# Altium PCB PCB_555振荡器_2_2022-10-18.pcbdoc
Units mil, origin at the board's own origin, x right, y up, seen from the top; angles counter-clockwise.
Board outline 2742.28 x 2151.73 mil, 2 copper layers (Top Layer, Bottom Layer); 7 components, 6 nets, 26 pads, 0 vias.
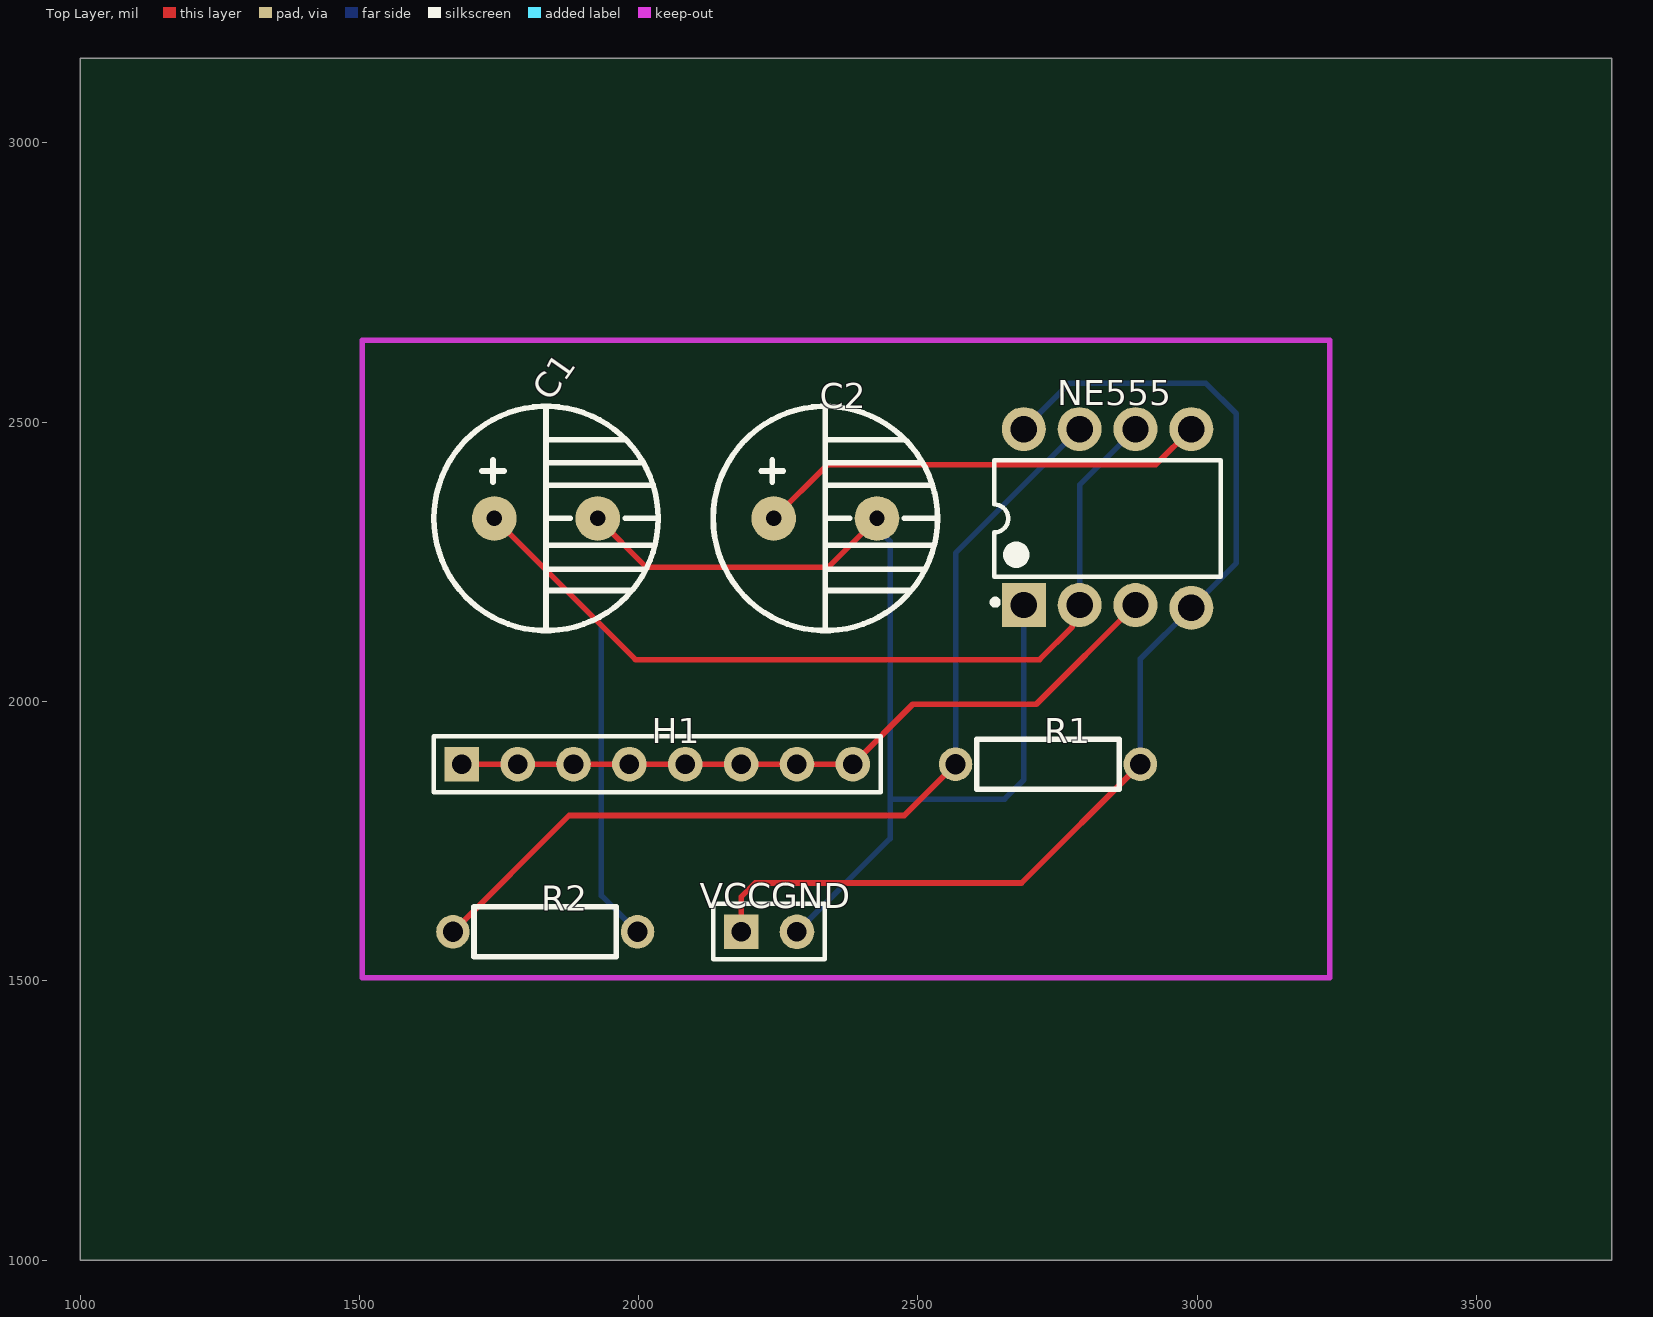
[diagram p0: Top Layer view]
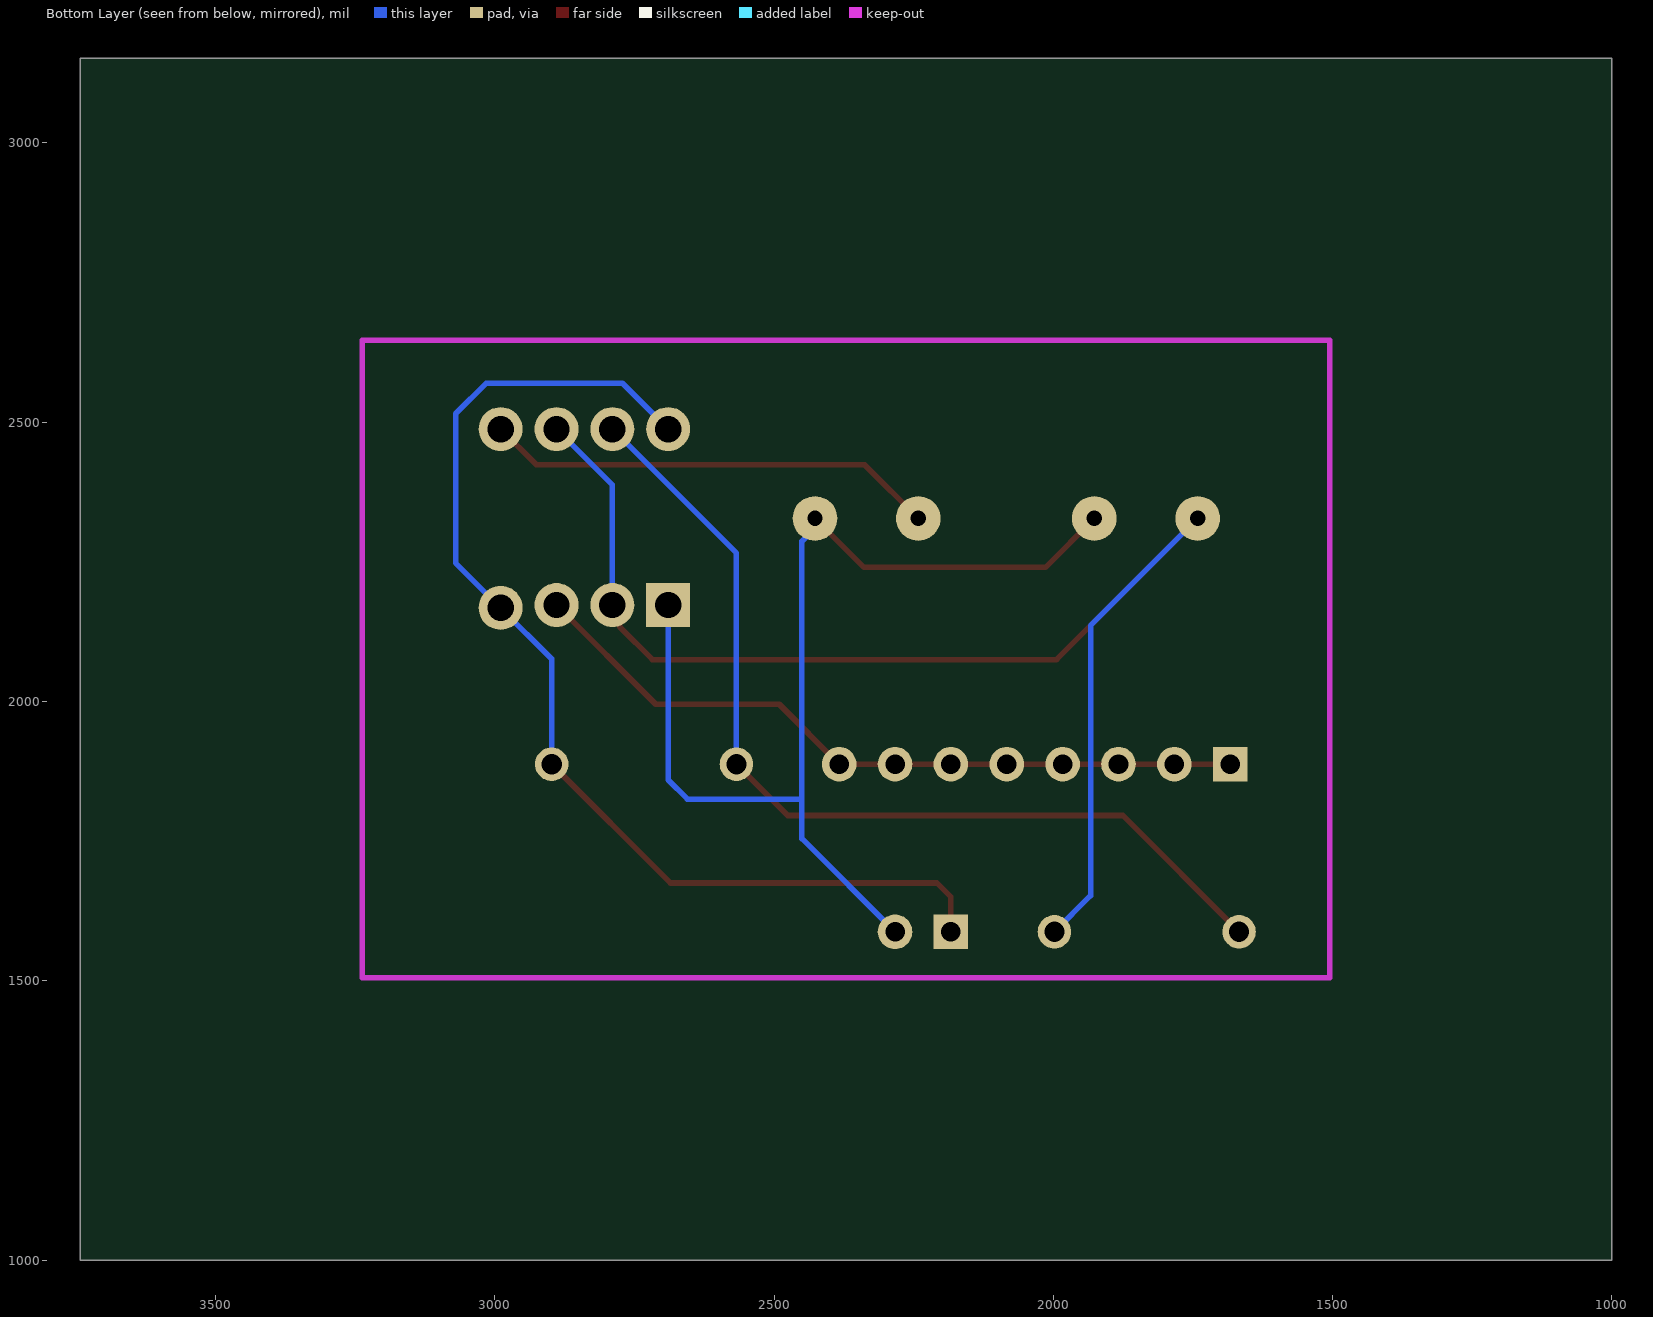
[diagram p1: Bottom Layer view, seen from below]

## Layer stack, top to bottom
Top Solder: solder mask 0.4, Solder Resist, Dk 3.5
Top Layer: signal copper 1.4
Dielectric1: dielectric 12.6, FR-4, Dk 4.8
Bottom Layer: signal copper 1.4
Bottom Solder: solder mask 0.4, Solder Resist, Dk 3.5

## Board outline
3742.28,1000 1000,1000 1000,3151.73 3742.28,3151.73

## Design rules (kind name [scope] priority, off if disabled: settings)
Clearance [All] p1: gap=10 ignorepadtopadclearanceinfootprint=FALSE except(0: Arc-Hole Track-Hole SMDPad-Hole THPad-Hole Via-Hole Fill-Hole Poly-Hole Region-Hole Text-Hole)
PolygonConnect [All] p1: connectstyle=Relief reliefconductorwidth=10 reliefentries=4 polygonreliefangle="90 Angle" airgapwidth=10
RoutingVias [All] p1: holewidth=28 width=50 viastyle="Through Hole" minholewidth=28 minwidth=50 maxholewidth=28 maxwidth=50
SolderMaskExpansion [All] p1: expansion=4 istentingtop=FALSE
Width [All] p1: maxlimit=10 minlimit=10 preferedwidth=10
30 further rules are at their usual default settings.

## Components (designator, comment, footprint, x,y, rotation, side; value= is the part's Value field where it differs from the comment)
C1 "直插电容470UF" ?#1 1834.1,2327.64 r0 top
C2 "直插电容10nF" ?#1 2334.1,2327.64 r0 top
H1 "HDR-F-2.54_1x8" HDR-F-2.54_1X8 1983.31,1887.64 r0 top
NE555 "NE555P" ?#2 2839.41,2327.64 r0 top
R1 "1k" ?#3 2732.66,1887.64 r0 top
R2 "1k" ?#3 1832.66,1587.64 r0 top
VCCGND "HDR-F-2.54_1x2" HDR-F-2.54_1X2 2233.31,1587.64 r0 top

## Footprints (in the part's own frame and the unit in brackets; to place one, negate y for a bottom-side part, rotate by r counter-clockwise, add the part's x,y. Pads: shape width x height; smd on the part's side, far side on the other; paste and mask are expansions set on the pad)
HDR-F-2.54_1X2 [mil]
  rect 62x62 hole 35: 1(-50,0)
  round 62 hole 35: 2(50,0)
  silkscreen extent -100,-49 100,50
HDR-F-2.54_1X8 [mil]
  rect 62x62 hole 35: 1(-300,0)
  round 62 hole 35: 2(-200,0) 3(-100,0) 4(0,0) 5(100,0) 6(200,0) 7(300,0) 8(400,0)
  silkscreen extent -350,-50 450,50
?#1 [mil]
  round 80 hole 27.56: 1(-92.52,0) 2(92.52,0)
  silkscreen extent -201,-201 201,201
?#2 [mil]
  rect 78.74x78.74 hole 47.24: 1(-150,-155)
  round 78.74 hole 47.24: 2(-50,-155) 3(50,-155) 4(150,-160) 5(150,160) 6(50,160) 7(-50,160) 8(-150,160)
  silkscreen extent -206,-155 203,104
?#3 [mil]
  round 60 hole 36: 1(-165.35,0) 2(165.35,0)
  silkscreen extent -128,-45 127,45

## Nets (pads, with @x,y where several pads share a name; then routed paths per layer and width w, separated by ;. In a path a pad name is that pad's centre, name@x,y a point inside that pad or via, vN(x,y) a via of type N, cw(c..) or ccw(c..) an arc to the next point about the centre after c; other vN are vias at no path point)
C1_1: C1.1 NE555.2 NE555.6 R2.2 | length 2410.9
  Top Layer w10: C1.1 1994.22,2075 2717.92,2075 2776.26,2133.34 2776.26,2159.49 NE555.2
  Bottom Layer w10: C1.1 1933.31,2135.91 1933.31,1652.35 R2.2 ; NE555.2 2789.41,2387.64 NE555.6
C2_1: C2.1 NE555.5 | length 814.1
  Top Layer w10: C2.1 2337.72,2423.78 2925.55,2423.78 NE555.5
GND: C1.2 C2.2 NE555.1 VCCGND.2 | length 1958.2
  Top Layer w10: C1.2 2014.25,2240 2338.97,2240 C2.2
  Bottom Layer w10: VCCGND.2 2450,1754.33 2450,1825 ; C2.2 2426.62,2310.16 2450,2286.78 2450,1825 ; NE555.1 2689.41,1859.41 2655,1825 2450,1825
R2_1: NE555.7 R1.1 R2.1 | length 1716.3
  Top Layer w10: R2.1 1875.49,1795.82 2475.49,1795.82 R1.1
  Bottom Layer w10: R1.1 2567.31,2265.54 NE555.7
U1_3: H1.1 H1.2 H1.3 H1.4 H1.5 H1.6 H1.7 H1.8 NE555.3 | length 1324.2
  Top Layer w10: H1.1 H1.2 H1.3 H1.4 H1.5 H1.6 H1.7 H1.8 2490.67,1995 2711.77,1995 NE555.3
VCC5V: NE555.4 NE555.8 R1.2 VCCGND.1 | length 2011.6
  Top Layer w10: VCCGND.1 2183.31,1650 2208.31,1675 2685.38,1675 R1.2
  Bottom Layer w10: NE555.8 2771.77,2570 3015,2570 3070,2515 3070,2248.23 NE555.4 2898.02,2076.25 R1.2

## Silkscreen, mask and mechanical layers (free items; w line width, h text height)
Document:
  lines w0.1: 2371.13,2075.86 2371.15,2075.88